# Altium PCB DC-IN-TH_DC-042C-Z-2.5-A.pcbdoc
Units mm, origin at the board's own origin, x right, y up, seen from the top; angles counter-clockwise.
Board outline 27.61 x 24.5 mm, 2 copper layers (Top Layer, Bottom Layer); 1 components, 0 nets, 6 pads, 0 vias.
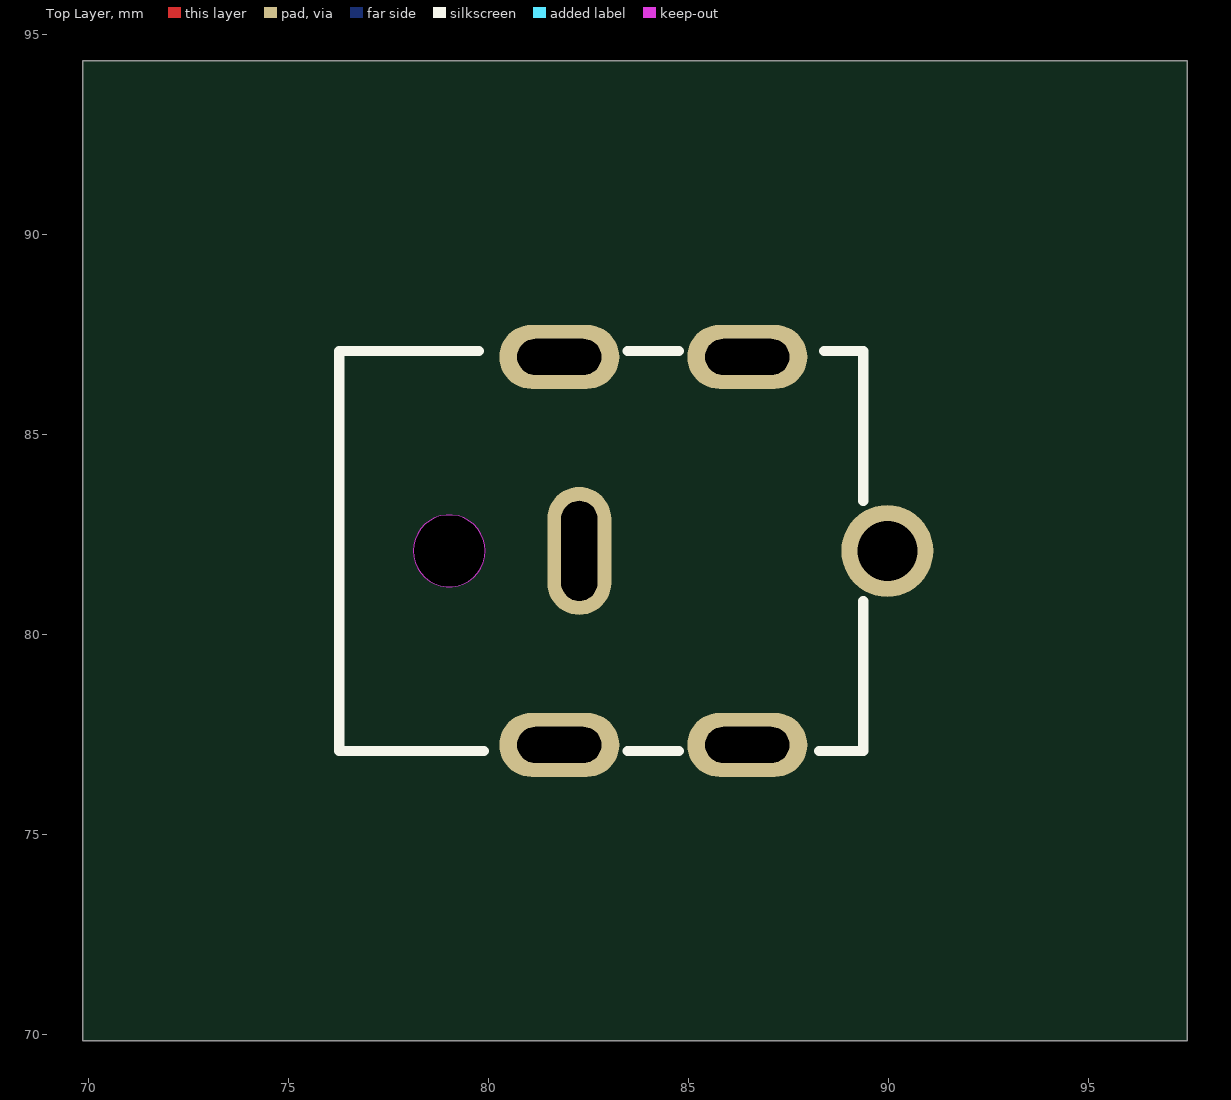
[diagram p0: Top Layer view]
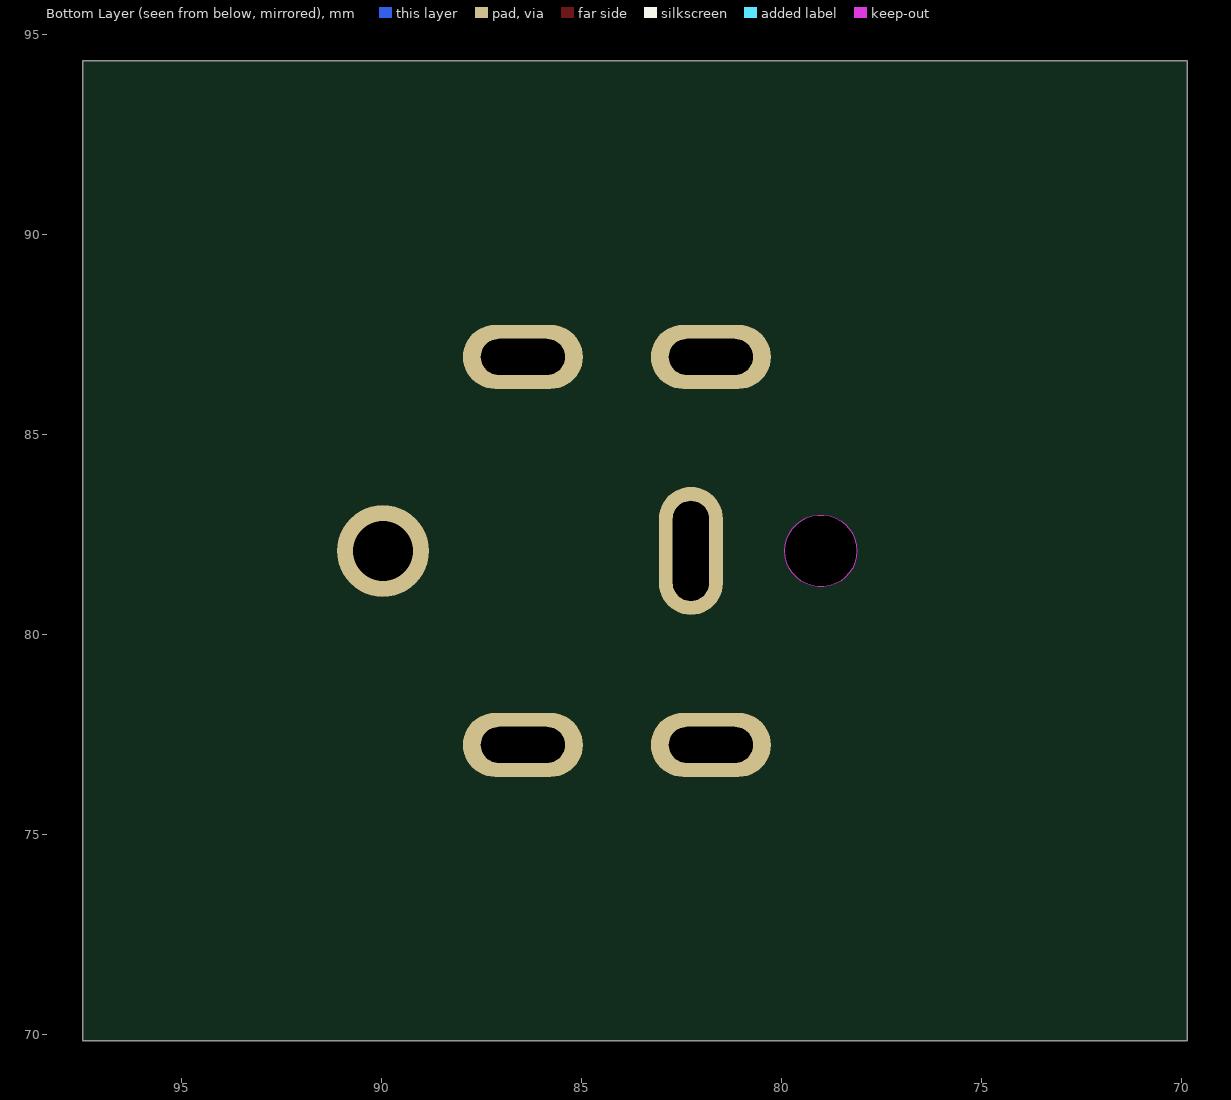
[diagram p1: Bottom Layer view, seen from below]

## Layer stack, top to bottom
Top Layer: signal copper (thickness not stored)
Dielectric: dielectric 0.32, FR-4, Dk 4.8
Bottom Layer: signal copper (thickness not stored)

## Board outline
97.46,69.85 69.85,69.85 69.85,94.35 97.46,94.35

## Components (designator, comment, footprint, x,y, rotation, side; value= is the part's Value field where it differs from the comment)
? "DC-IN-TH_DC-042C-Z-2.5-A" DC-IN-TH_DC-042C-Z-2.5-A 85.86,82.1 r0 top

## Footprints (in the part's own frame and the unit in brackets; to place one, negate y for a bottom-side part, rotate by r counter-clockwise, add the part's x,y. Pads: shape width x height; smd on the part's side, far side on the other; paste and mask are expansions set on the pad)
DC-IN-TH_DC-042C-Z-2.5-A [mm]
  oval 3x1.6 hole 0.9 slot 2.1 at 0 deg copper offset 0,0: 1(-4.1,-4.85) 1(-4.1,4.85) 1(0.6,-4.85) 1(0.6,4.85)
  oval 1.6x3.2 hole 0.9 slot 2.5 at 90 deg: 2(-3.6,0)
  round 2.3 hole 1.5 copper offset 0,0: 3(4.1,0)
  Multi-Layer board cut-out: -5.95,0 -6.039,0.391 -6.289,0.704 -6.65,0.878 -7.05,0.878 -7.411,0.704 -7.661,0.391 -7.75,0 -7.75,0 -7.661,-0.39 -7.411,-0.704 -7.05,-0.877 -6.65,-0.877 -6.289,-0.704 -6.039,-0.39 -5.95,0
  Multi-Layer keep-out region: -5.95,0 -6.039,0.391 -6.289,0.704 -6.65,0.878 -7.05,0.878 -7.411,0.704 -7.661,0.391 -7.75,0 -7.75,0 -7.661,-0.39 -7.411,-0.704 -7.05,-0.877 -6.65,-0.877 -6.289,-0.704 -6.039,-0.39 -5.95,0
  silkscreen extent -9.6,-5 3.5,5

## Nets (pads, with @x,y where several pads share a name; then routed paths per layer and width w, separated by ;. In a path a pad name is that pad's centre, name@x,y a point inside that pad or via, vN(x,y) a via of type N, cw(c..) or ccw(c..) an arc to the next point about the centre after c; other vN are vias at no path point)
pads on no net: ?.1 ?.2 ?.3